# EAGLE board XMICRO-CF Shield V1.0 (EAGLE 6.3)
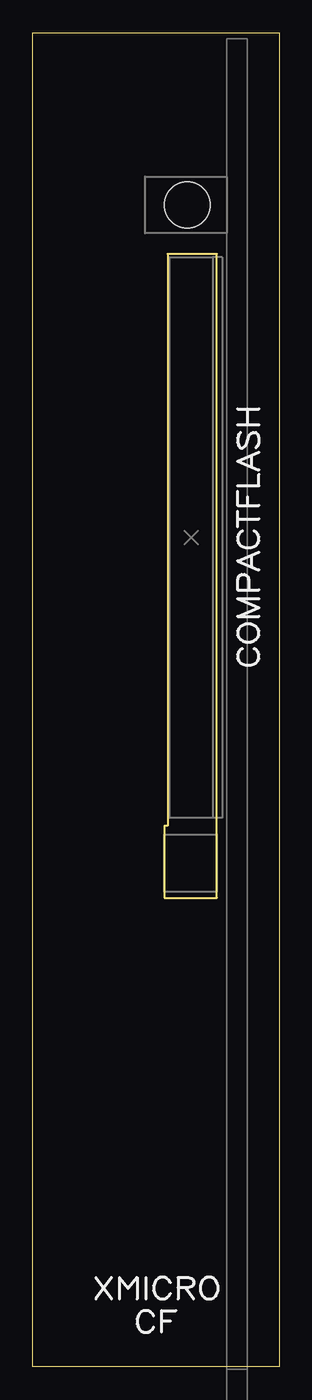
[diagram p0: board, top side]
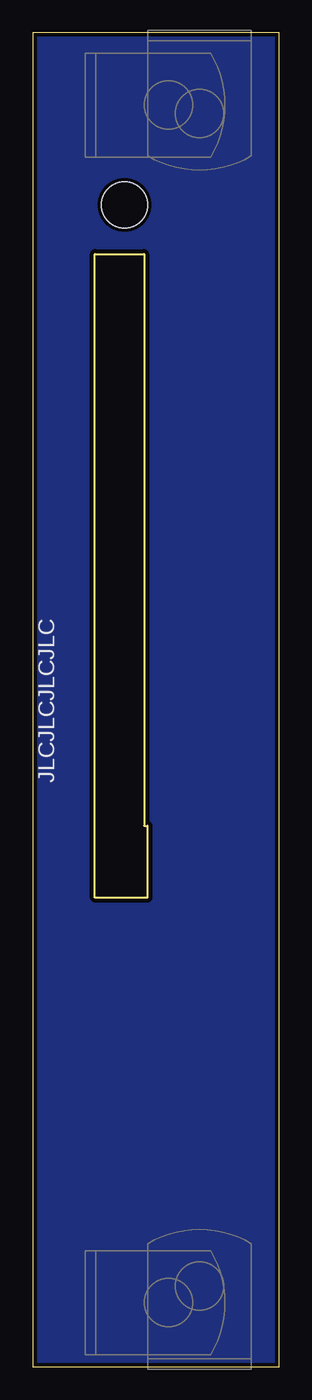
[diagram p1: board, bottom side, seen from below]

Size 18.8 x 101.85 mm. Coordinates in mm from the lower left corner, seen from the top.
Outline: 0,0 0,101.85 18.8,101.85 18.8,0 0,0
Copper layers (1*16): Top 0.035mm / dielectric 1.5mm / Bottom 0.035mm
Design rules "JLCPCB Custom": minimum track width 5mil, minimum drill 0.3mm, track to track 5mil, track to pad 8mil, pad to pad 8mil, via to via 8mil, smd to smd 5mil, copper to edge 0.3mm, drill to drill 0.3mm, minimum pad ring 10mil, minimum via ring 8mil, stop-mask expansion 0mil, vias tented up to drill 25mil, thermal gap 10mil
Net classes: 1 0V: clearance 0.305 mm

## Footprints (pad centres in the part's own frame; a part is rotated, then mirrored left to right if it is on the bottom)
LED-3MM-R = hole 3.5: 0,2.997

## Placement (x,y rotation side)
E$1  [LED-3MM-R]  14.8,88.71 90 top
E$4  [CF-KYOCERA-E]  14.8,63.31 90 top
E$5  [614-HN]  6.06,-0.19 0 bottom
E$6  [614-HN]  6.06,102.04 180 bottom
E$7  [614-HN]  14.8,4.89 270 bottom
E$8  [614-HN]  14.8,96.33 270 bottom

## Library data of the parts
E$1 E$4-E$8 = panel

## Tracks (layer width: path | path; a pad name or v marks a point on that pad's centre or on a via)
CGND
  pour Bottom: 0,101.85 18.8,101.85 18.8,0 0,0

## Text on the board
bPlace: JLCJLCJLCJLC